# Altium PCB PCB2.PcbDoc
Units mil, origin at the board's own origin, x right, y up, seen from the top; angles counter-clockwise.
Board outline 866.14 x 866.14 mil, 4 copper layers (Top Layer, Internal Plane 1, Signal Layer 1, Bottom Layer), stack 30.634 mil thick; 48 components, 32 nets, 165 pads, 223 vias.
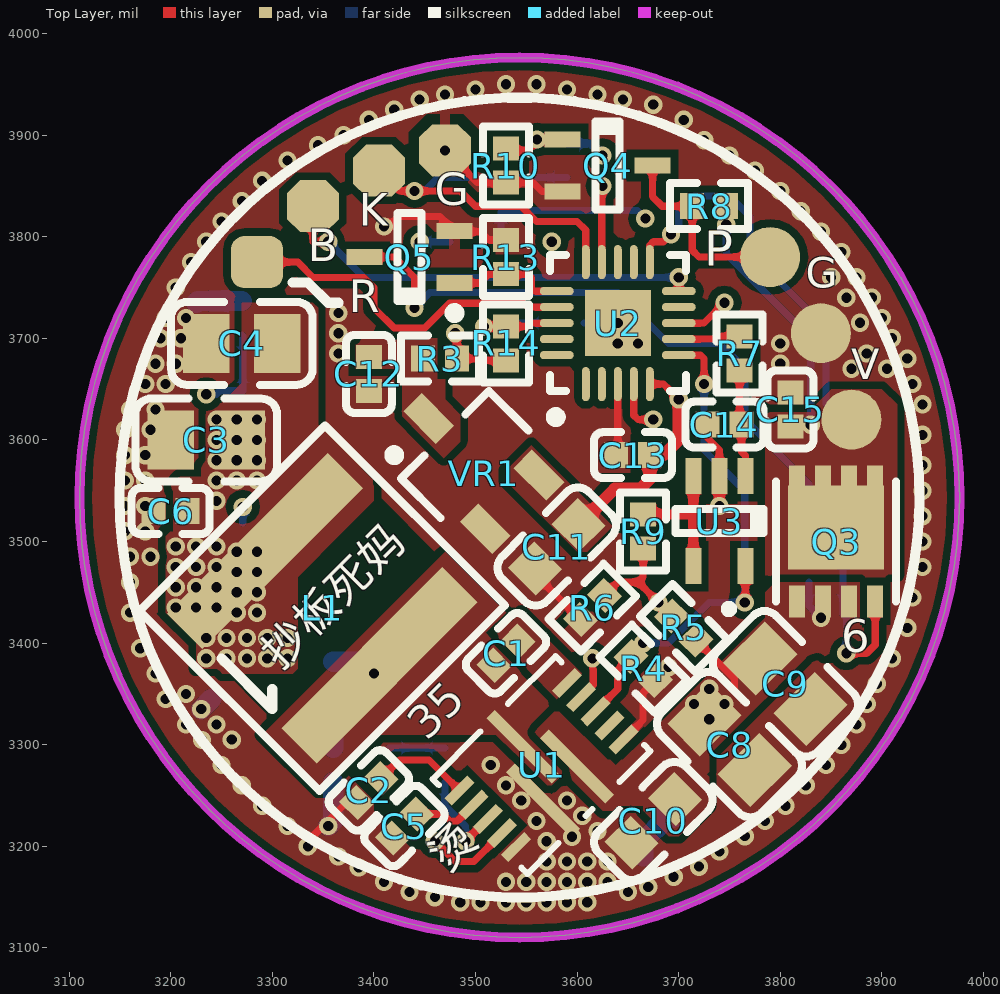
[diagram p0: Top Layer view]
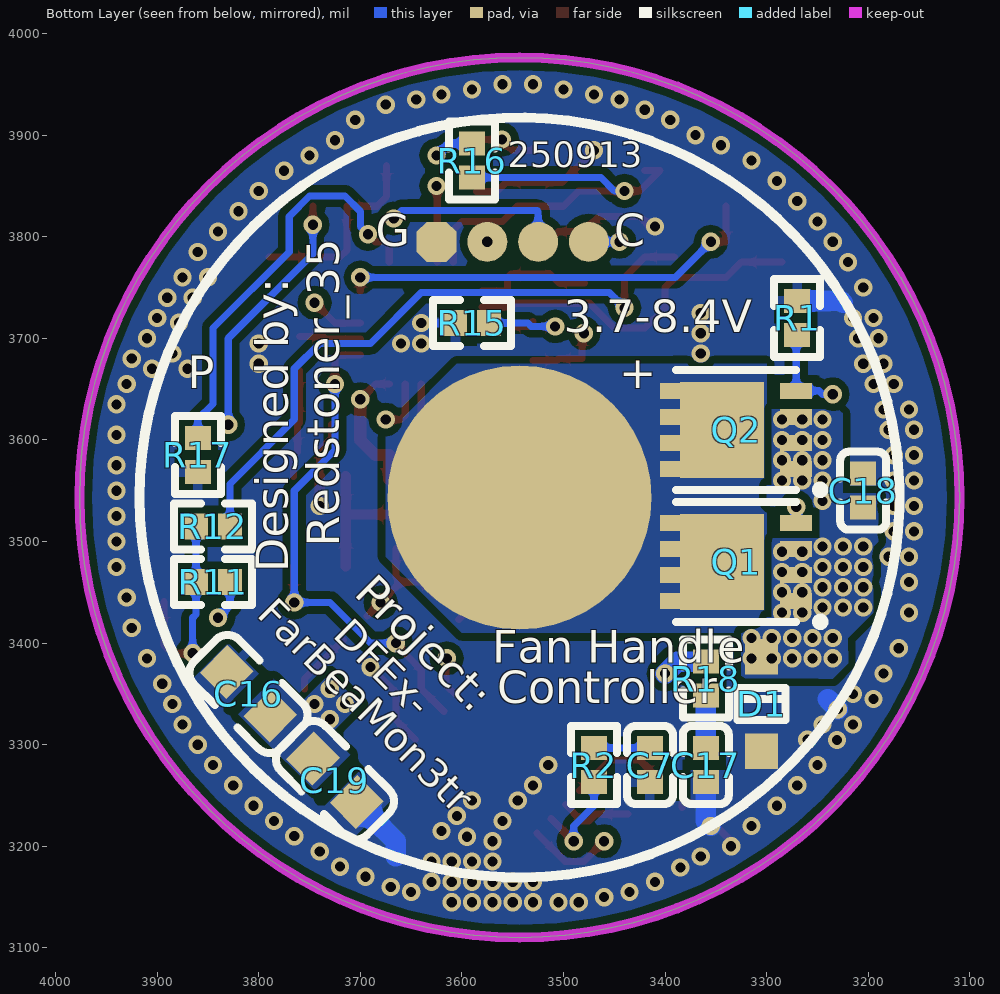
[diagram p1: Bottom Layer view, seen from below]
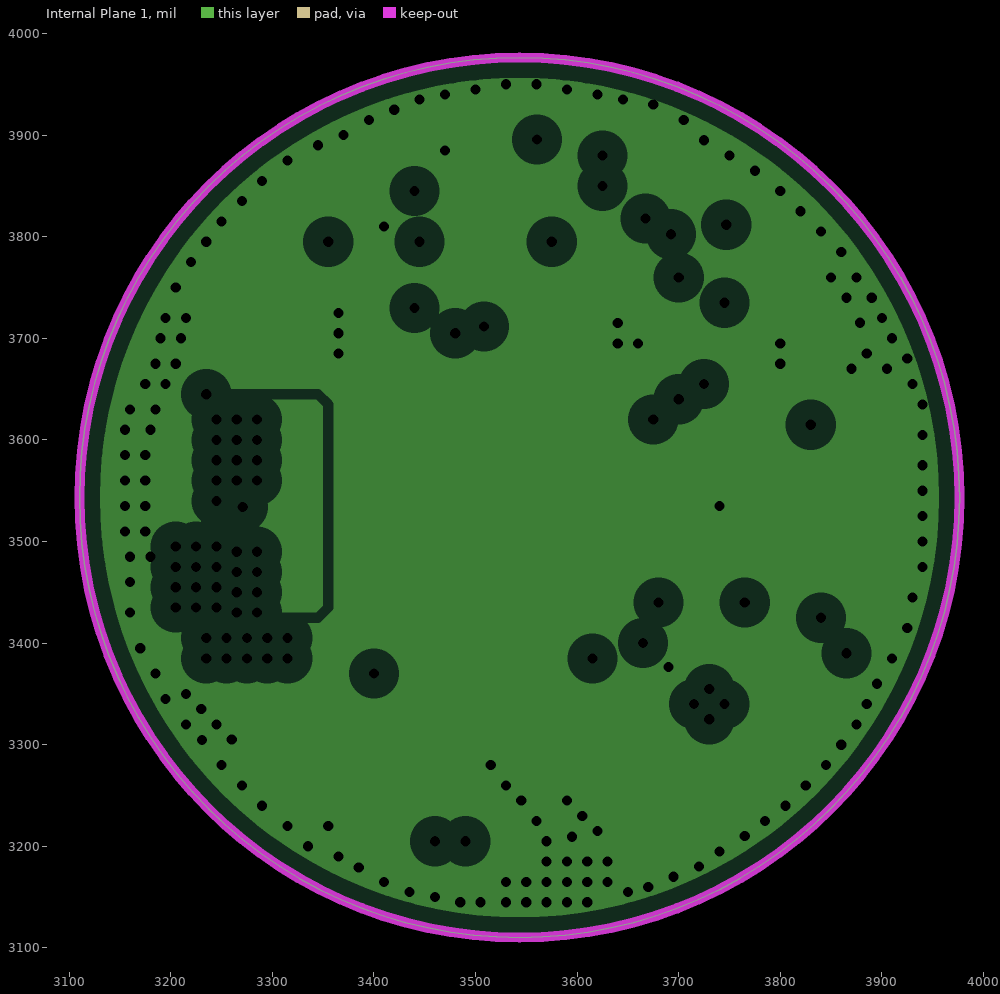
[diagram p2: Internal Plane 1, clearances drawn from the general rule]
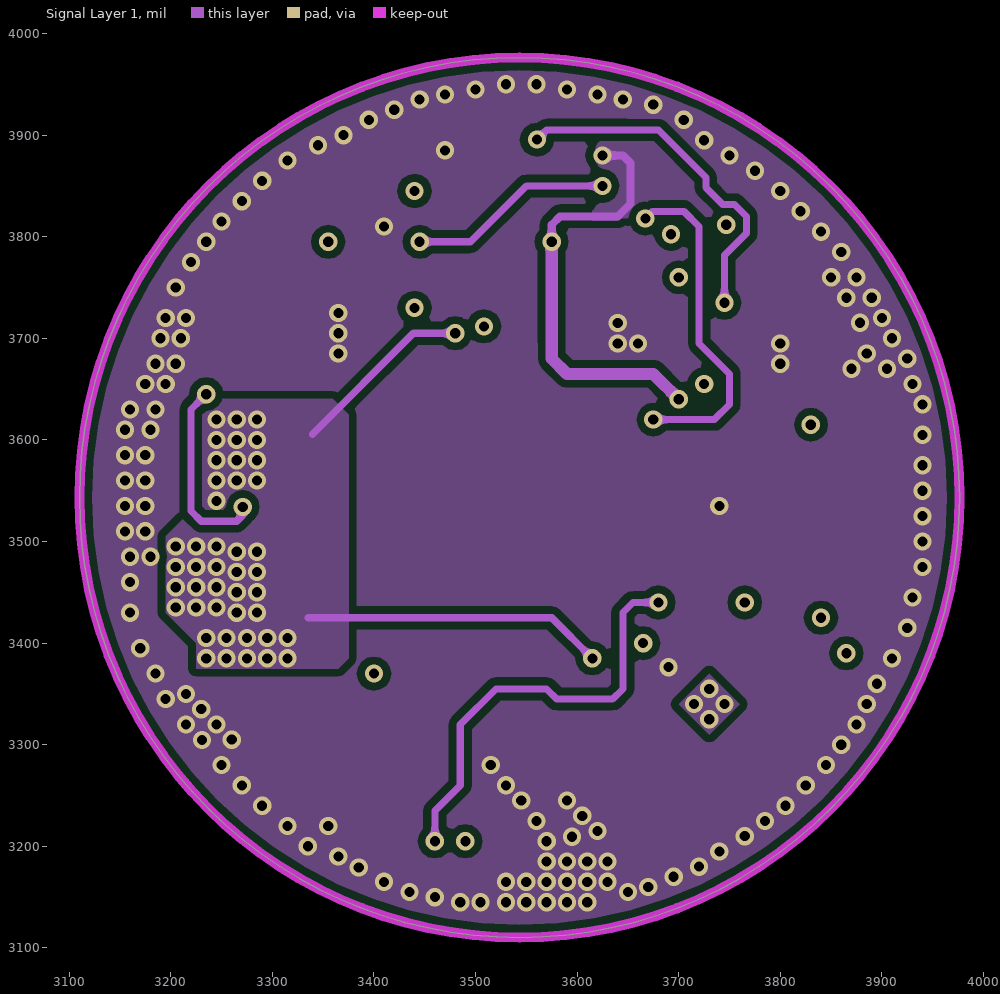
[diagram p3: Signal Layer 1]
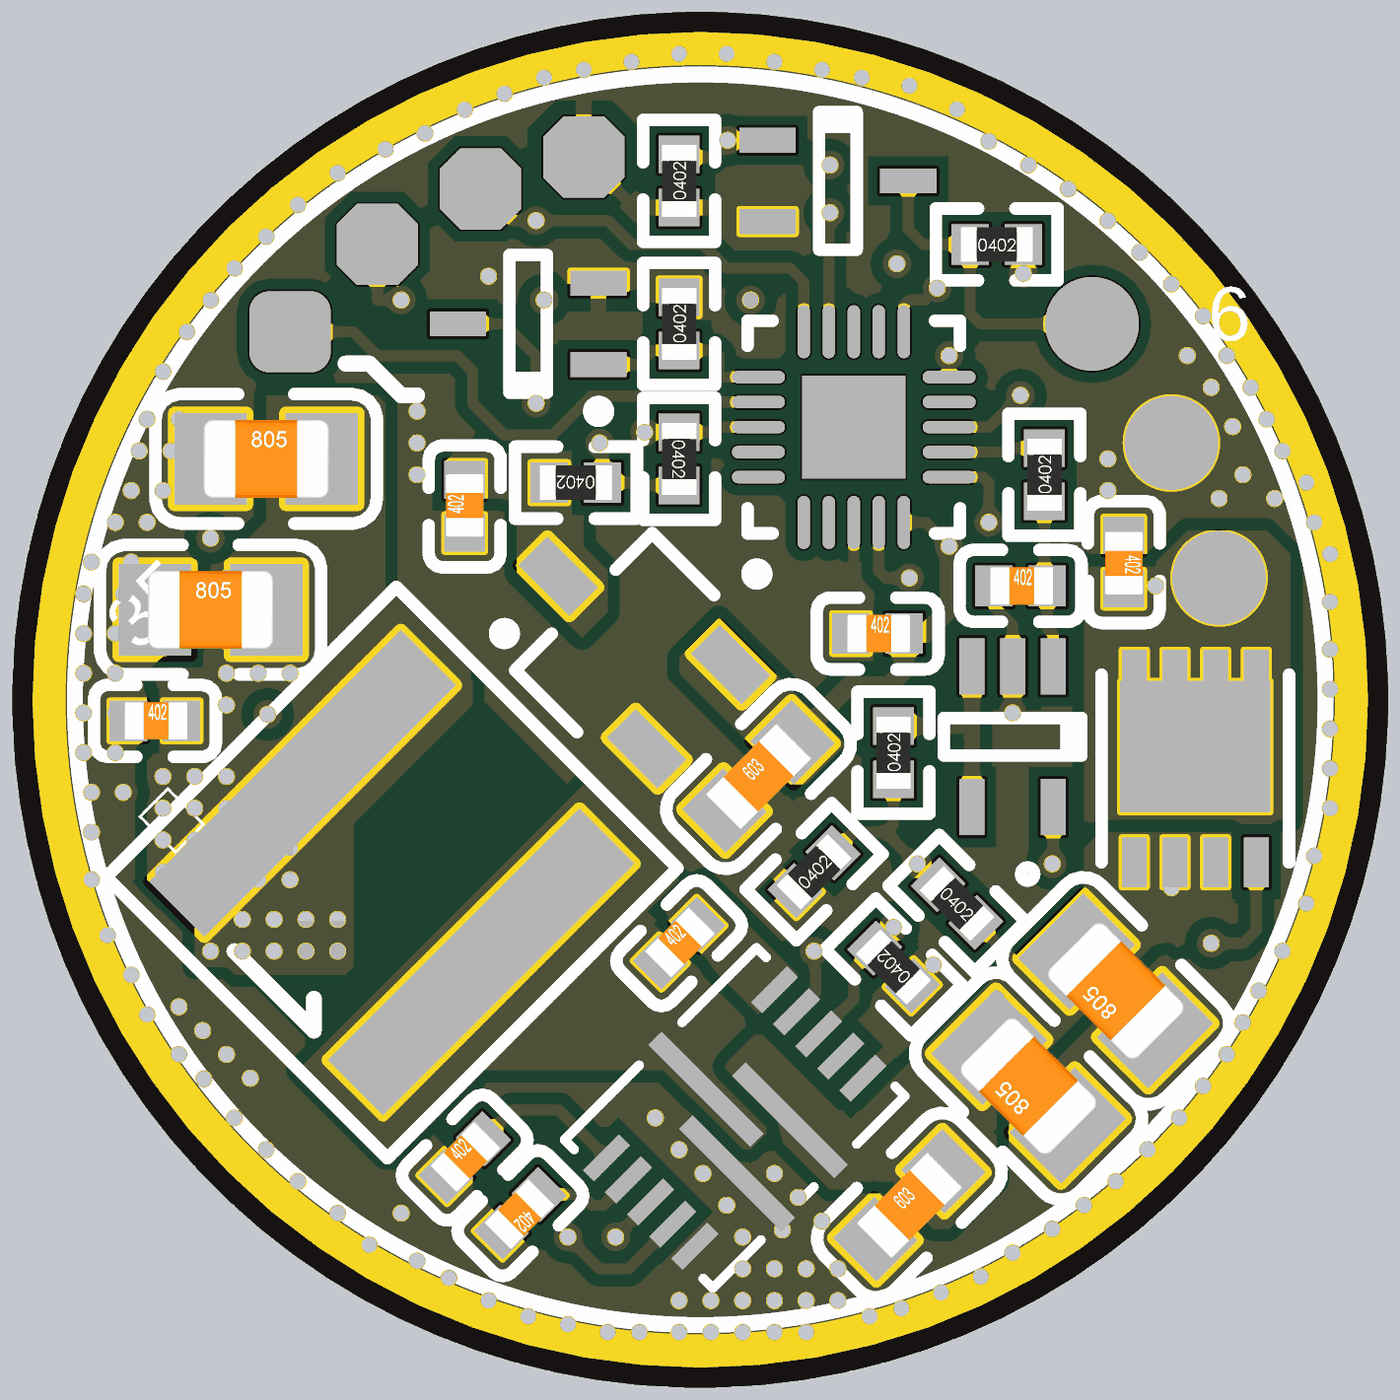
[diagram p4: 3D render of the assembled board from above, using the file's embedded part models]
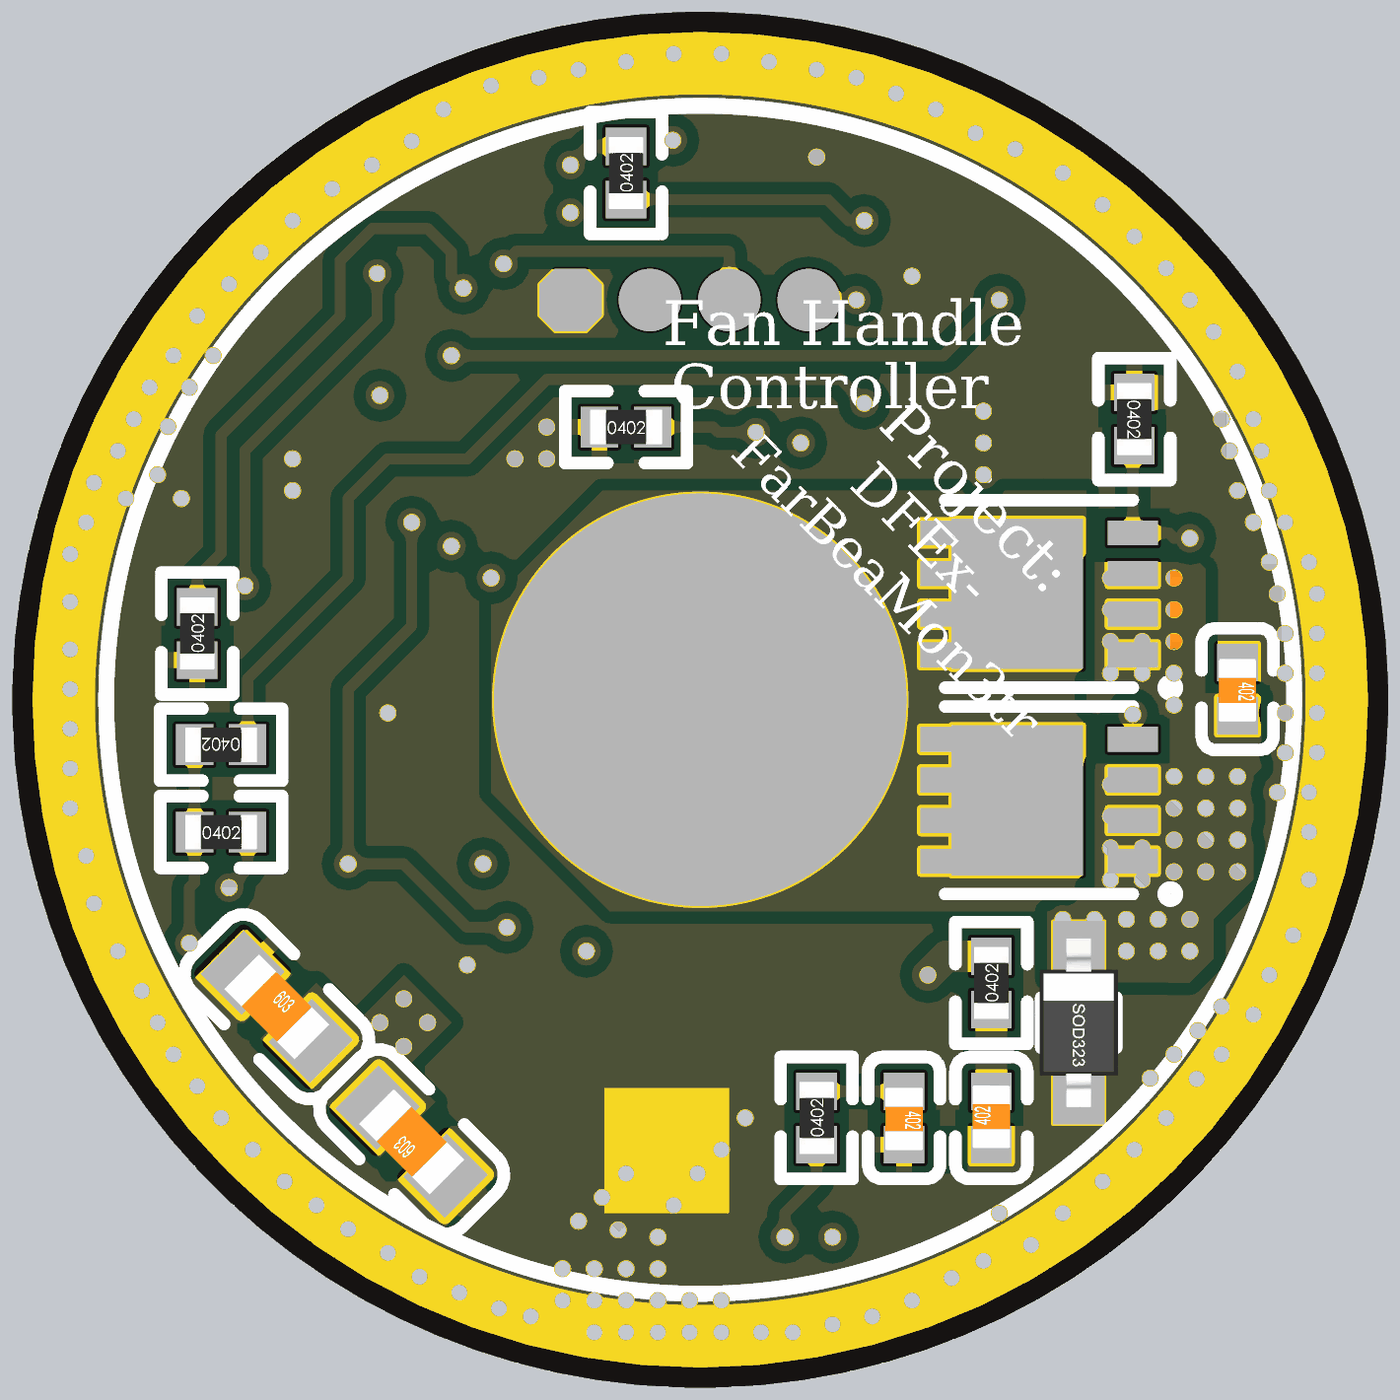
[diagram p5: 3D render of the assembled board from below, using the file's embedded part models]

## Layer stack, top to bottom
Top Solder: solder mask 0.4, Solder Resist, Dk 3.5
Top Layer: signal copper 1.4
Dielectric 1: core 10, FR-4, Dk 4.2
Internal Plane 1: plane copper 1.417
Dielectric 3: prepreg 5, Dk 4.2
Signal Layer 1: signal copper 1.417
Dielectric 2: core 10, Dk 4.2
Bottom Layer: signal copper 1.4
Bottom Solder: solder mask 0.4, Solder Resist, Dk 3.5

## Board outline
3543.31,3110.24 cw(c3543.31,3543.31) 3110.24,3543.31 cw(c3543.31,3543.31) 3543.31,3976.38 cw(c3543.31,3543.31) 3976.38,3543.31 cw(c3543.31,3543.31)

## Design rules (kind name [scope] priority, off if disabled: settings)
Clearance [All] p1: gap=7.5
PlaneClearance [All] p1: clearance=19.68
PlaneConnect [All] p1: planeconnectstyle=Direct reliefexpansion=20 reliefentries=4 reliefconductorwidth=10 reliefairgap=10
PolygonConnect PolygonConnect_1 [IsVia] p1: connectstyle=Direct reliefconductorwidth=10 reliefentries=4 polygonreliefangle="90 Angle" airgapwidth=10
PolygonConnect [All] p2: connectstyle=Direct reliefconductorwidth=10 reliefentries=4 polygonreliefangle="90 Angle" airgapwidth=10
RoomDefinition main [InComponentClass('main')] p1: confinementstyle=ConfineIn formatcopy=TRUE lockcomponents=FALSE outline 4040,3050 5420,3050 5420,3325 4040,3325
RoutingVias [All] p1: holewidth=28 width=50 viastyle="Through Hole" minholewidth=28 minwidth=50 maxholewidth=28 maxwidth=50
SolderMaskExpansion [All] p1: expansion=4
Width [All] p1: maxlimit=393.7 minlimit=7 preferedwidth=10
28 further rules are at their usual default settings.

## Components (designator, comment, footprint, x,y, rotation, side; value= is the part's Value field where it differs from the comment)
C1 "220nF (224) 10% 16V" 0402_C 3530,3390 r45 top
C2 "10uF (106) 20% 10V" 0402_C 3395,3255 r45 top
C3 "GRM21BR61A476ME15L" 0805_C 3235,3600 r0 top
C4 "GRM21BR61A476ME15L" 0805_C 3270,3695 r0 top
C5 "22nF (223) 10% 50V" 0402_C 3430,3220 r225 top
C6 "10uF (106) 20% 10V" 0402_C 3200,3530 r0 top
C7 "6.8nF (682) 10% 50V" 0402_C 3415,3280 r270 bottom
C8 "22uF (226) 20% 25V" 0805_C 3750,3300 r135 top
C9 "22uF (226) 20% 25V" 0805_C 3805,3360 r135 top
C10 "GRM188R61E106KA73D" 0603_C 3675,3225 r45 top
C11 "GRM188R61E106KA73D" 0603_C 3580,3495 r45 top
C12 "10uF (106) 20% 10V" 0402_C 3395,3665 r90 top
C13 "100nF (104) 10% 16V" 0402_C 3655,3585 r0 top
C14 "1.0uF (105) 10% 25V" 0402_C 3745,3615 r0 top
C15 "1.0uF (105) 10% 25V" 0402_C 3810,3630 r270 top
C16 "GRM188R61E106KA73D" 0603_C 3810,3350 r225 bottom
C17 "1nF (102) 10% 50V" 0402_C 3360,3280 r90 bottom
C18 "10uF (106) 20% 10V" 0402_C 3205,3550 r270 bottom
C19 "GRM188R61E106KA73D" 0603_C 3725,3265 r45 bottom
D1 "CESD12VD3" SOD-323 3305,3340 r270 bottom
L1 "XGL6060-102MEC" XAL6030-xxxME 3405,3380 r135 top locked
Q1 "XPX80P02RX" DFN-8_L3.0-W3.0-P0.65-BL 3330,3480 r90 bottom
Q2 "XPX80P02RX" DFN-8_L3.0-W3.0-P0.65-BL 3330,3610 r90 bottom
Q3 "XPX70P03RX" DFN-8_L3.0-W3.0-P0.65-BL 3855,3500 r0 top locked
Q4 "2N7002KW" SC70-3 3630,3870 r0 top locked
Q5 "2N7002KW" SC70-3 3435,3780 r180 top
R1 "10KΩ (1002) ±1%" 0402_R 3270,3720 r270 bottom
R2 "21.5KΩ (2152) ±1%" 0402_R 3470,3280 r90 bottom
R3 "10Ω (10R0) ±1%" 0402_R 3465,3680 r180 top
R4 "10KΩ (1002) ±1%" 0402_R 3665,3375 r135 top
R5 "510KΩ (5103) ±1%" 0402_R 3705,3415 r315 top
R6 "59KΩ (5902) ±1%" 0402_R 3615,3435 r45 top
R7 "10KΩ (1002) ±1%" 0402_R 3760,3685 r90 top
R8 "22KΩ (2202) ±1%" 0402_R 3730,3830 r0 top
R9 "220KΩ (2203) ±1%" 0402_R 3665,3510 r90 top
R10 "10KΩ (1002) ±1%" 0402_R 3530,3870 r90 top
R11 "51KΩ (5102) ±1%" 0402_R 3845,3460 r180 bottom
R12 "47KΩ (4702) ±1%" 0402_R 3845,3515 r0 bottom
R13 "10KΩ (1002) ±1%" 0402_R 3530,3780 r90 top
R14 "470KΩ (4703) ±1%" 0402_R 3530,3695 r270 top
R15 "100KΩ (1003) ±1%" 0402_R 3590,3715 r180 bottom
R16 "10KΩ (1002) ±1%" 0402_R 3590,3875 r90 bottom
R17 "0Ω (0R0) ±1%" 0402_R 3860,3585 r90 bottom
R18 "4.7Ω (4R70) ±1%" 0402_R 3360,3365 r90 bottom
U1 "MP3429GL-Z" QFN-MLP3*4-13L 3565,3280 r315 top
U2 "CMS8S6990NAQN20" QFN40P300X300X800_HS-21N 3640,3715 r90 top
U3 "LMV321IDCKR" SC70-5 3740,3520 r270 top locked
VR1 "ME6209A30M3G" SOT-23-3L 3495,3580 r315 top locked

## Footprints (in the part's own frame and the unit in brackets; to place one, negate y for a bottom-side part, rotate by r counter-clockwise, add the part's x,y. Pads: shape width x height; smd on the part's side, far side on the other; paste and mask are expansions set on the pad)
0402_C [mm]
  rect 0.6x0.65 smd mask+0.051: 1(-0.425,0) 2(0.425,0)
  silkscreen extent -0.98,-0.58 0.98,0.58, body extent -0.48,-0.3 0.52,0.3, height 0.2
0402_R [mm]
  rect 0.6x0.65 smd mask+0.051: 1(-0.425,0) 2(0.425,0)
  silkscreen extent -0.97,-0.58 0.97,0.58, body extent -0.57,-0.27 0.58,0.28, height 0.41
0603_C [mm]
  rect 0.93x0.98 smd: 1(-0.77,0) 2(0.77,0)
  silkscreen extent -1.53,-0.79 1.54,0.79, body extent -0.8,-0.4 0.8,0.4, height 0.3
0805_C [mm]
  rect 1.16x1.47 smd: 1(-0.89,0) 2(0.89,0)
  silkscreen extent -1.77,-1.04 1.77,1.04, body extent -1,-0.62 1,0.63, height 0.77
DFN-8_L3.0-W3.0-P0.65-BL [mm]
  rect 0.4x0.8 smd paste-100 mask+0.051: 1(-0.975,-1.5) 2(-0.325,-1.5) 3(0.325,-1.5) 4(0.975,-1.5) 5(0.975,1.5) 6(0.325,1.5) 7(-0.325,1.5) 8(-0.975,1.5)
  rect 2.4x2.1 smd paste-100 mask+0.051: 8(0,0.35)
  silkscreen extent -1.6,-2.2 1.5,1.5, body extent -1.52,-1.52 1.52,1.52, height 1.2
QFN40P300X300X800_HS-21N [mm] "QFN, 20-Leads, Body 3.00x3.00mm, Pitch 0.40mm, Thermal Pad 1.65x1.65mm, IPC Medium Density"
  oval 0.85x0.2 smd mask+0.03: 1(-1.525,0.8) 2(-1.525,0.4) 3(-1.525,0) 4(-1.525,-0.4) 5(-1.525,-0.8) 11(1.525,-0.8) 12(1.525,-0.4) 13(1.525,0) 14(1.525,0.4) 15(1.525,0.8)
  oval 0.2x0.85 smd mask+0.03: 6(-0.8,-1.525) 7(-0.4,-1.525) 8(0,-1.525) 9(0.4,-1.525) 10(0.8,-1.525) 16(0.8,1.525) 17(0.4,1.525) 18(0,1.525) 19(-0.4,1.525) 20(-0.8,1.525)
  rect 1.65x1.65 smd mask+0.03: 21(0,0)
  silkscreen extent -2.47,-1.7 1.7,1.7, body extent -1.55,-1.55 1.55,1.55, height 0.8
QFN-MLP3*4-13L [mil] "MP3429/MP3431通用的FCQFN3*4mm的封装"
  rect 91x12 smd paste+0 mask+0: 1(-25.59,0) 7(25.59,-23.62) 8(25.59,23.62)
  rect 10x32 smd paste+0 mask+0: 2(-39.37,-74.8) 3(-19.69,-74.8) 4(0,-74.8) 5(19.69,-74.8) 6(39.37,-74.8) 9(39.37,74.8) 10(19.69,74.8) 11(0,74.8) 12(-19.69,74.8) 13(-39.37,74.8)
  silkscreen extent -66,-86 66,86, body extent -65,-85 65,85, height 39
SC70-3 [mm] "3 Lead SC70(SOT-323) package for small Transistor"
  rect 0.9x0.4 smd mask+0.05: 1(-1.125,0.65) 2(-1.125,-0.65) 3(1.125,0)
  silkscreen extent -0.3,-1.1 0.3,1.1, body extent -0.67,-1.1 0.67,1.1, height 1.1
SC70-5 [mm] "SOT23, 6-Leads, Body 2.00x2.10mm, Pitch 0.65mm, IPC Medium Density"
  rect 0.9x0.4 smd mask+0.05: 1(-1.125,0.65) 2(-1.125,0) 3(-1.125,-0.65) 4(1.125,-0.65) 5(1.125,0.65)
  silkscreen extent -0.3,-1.1 0.3,1.1, body extent -0.67,-1.1 0.67,1.1, height 1.1
SOD-323 [mm]
  rect 0.889x0.83 smd mask+0.025: 1(1.18,0) 2(-1.18,0)
  silkscreen extent -0.4,-0.6 0.4,0.6, body extent -1.35,-0.63 1.35,0.62, height 1.1
SOT-23-3L [mm] "http://www.aosmd.com/res/packaging_information/SOT-23-3L.pdf"
  rect 1.15x0.65 smd: 1(1.475,-0.95) 2(1.475,0.95) 3(-1.475,0)
  silkscreen extent -1.56,-1.55 0.5,1.55, body extent -0.9,-1.55 0.9,1.55, height 1.25
XAL6030-xxxME [mm] "CoilCraft XAL6030 molded inductor"
  rect 1.25x5.69 smd: 1(4.001,0.025) 2(-0.039,0.025)
  silkscreen extent -1.2,-3.25 5.16,3.31, body extent -1.19,-3.28 5.16,3.33, height 3.1

## Part data
C1: library part "0402 220nF (224) 10% 16V", "贴片电容"
C2 C6 C12 C18: library part "0402 10uF (106) 20% 6.3V", "贴片电容"
C3 C4: library part "0805 22uF (226) 20% 25V", "贴片MLCC电容，47uF (476) 20% 10V"
C5: library part "0402 22nF (223) 10% 50V", "贴片电容"
C7: library part "0402 10nF (103) 10% 50V", "贴片电容"
C8 C9: library part "0805 22uF (226) 20% 25V", "贴片电容"
C10 C16 C19: library part "0603 4.7uF (475) 10% 16V", "0603贴片MLCC电容 10uF ±20% 25V X5R"
C11: library part "0603 10uF (106) 10% 10V", "0603贴片MLCC电容 10uF ±20% 25V X5R"
C13: library part "0402 100nF (104) 10% 16V", "贴片电容"
C14 C15: library part "0402 1.0uF (105) 10% 25V", "贴片电容"
C17: library part "0402 1nF (102) 10% 50V", "贴片电容"
D1: library part "SOD-323 1N4148WS T4", "12V TVS二极管"
L1: library part "Inductor Iron", "线艺超低损耗系列一体成型电感 1.0uH±20% 2.5mΩ DCR 23A饱和电流 6.5*6.7*6.2mm"
Q1 Q2: library part "SON/DFN5x6 MOS", "-20V -80A 4mR内阻 P沟道MOSFET"
Q3: library part "SON/DFN5x6 MOS", "-30V -70A 6.5mR P沟道增强型MOSFET"
Q4 Q5: library part "2N7002 7002", "单N沟道MOSFET(场效应管)"
R1 R4 R7 R10 R13 R16: library part "0402 10KΩ (1002) 1%", "贴片电阻"
R2: library part "0402 18KΩ (1802) 1%", "贴片电阻"
R3: library part "0402 22Ω (22R0) 1%", "贴片电阻"
R5 R6: library part "0402 510KΩ (5103) 1%", "贴片电阻"
R8: library part "0402 22KΩ (2202) 1%", "贴片电阻"
R9 R15: library part "0402 100KΩ (1003) 1%", "贴片电阻"
R11: library part "0402 47KΩ (4702) 1%", "贴片电阻"
R12: library part "0402 51KΩ (5102) 1%", "贴片电阻"
R14: library part "0402 470KΩ (4703) 1%", "贴片电阻"
R17: library part "0402 0Ω (0R0) 1%", "贴片电阻"
R18: library part "0402 1Ω (1R00) 1%", "贴片电阻"
U1: "16VOUT, 21A Peak Current Fully Integrated Synchronous Boost Converter"
U2: library part CM8S6990NA-QFN20, "增强型闪存1T 8051单片机，16KB Flash 256+1K XRAM"
U3: "CMOS超小型运算放大器，SC70-5"
VR1: library part "SOT-23 XC6206P332MR", "低压差线性稳压(LDO)，输入耐压18V 输出3V 300mA最大电流 SOT23-3封装"

## Free pads (board coordinates)
  round 39.37 smd far side mask+1.18: 0(3475,3795) 1(3575,3795) 2(3525,3795)
  round 259.84 smd far side mask+1.18: 0(3543.31,3543.31)
  round 59.06 smd mask+1.18: 1(3870,3620) 2(3790,3780) 2(3840,3705)
  oct 39.37x39.37 smd far side mask+1.18: 2(3625,3795)
  rrect50% 51.18x51.18 smd mask+1.18: 3(3285,3775)
  oct 51.18x51.18 smd mask+1.18: 4(3340,3830) 5(3405,3865) 6(3470,3885)

## Via types
v1: diameter 18, hole 10, Top Layer to Bottom Layer, tented both sides, 223 vias

## Nets (pads, with @x,y where several pads share a name; then routed paths per layer and width w, separated by ;. In a path a pad name is that pad's centre, name@x,y a point inside that pad or via, vN(x,y) a via of type N, cw(c..) or ccw(c..) an arc to the next point about the centre after c; other vN are vias at no path point)
3V7: C3.2 C4.2 C6.2 C18.2 D1.2 L1.1 Q1.1 Q1.2 Q1.3 Q2.1 Q2.2 Q2.3 R3.1 R14.2 U1.12 | length 596.5
  Top Layer w7: v1(3480,3705) 3481.73,3703.27 R3.1 3505,3680 3506.73,3678.27 R14.2 ; U1.12 3615.9,3358.74 3615.9,3373.97 3615,3374.88 v1(3615,3385)
  Signal Layer 1 w7: 3335,3425 3575,3425 v1(3615,3385) ; 3339.4,3605.6 3438.79,3705 v1(3480,3705)
  other v1: 3235,3385 3255,3385 3275,3385 3295,3385 3315,3385 3235,3405 3255,3405 3275,3405 3295,3405 3315,3405 3265,3430 3285,3430 3205,3435 3225,3435 3245,3435 3265,3450 3285,3450 3205,3455 3225,3455 3245,3455 3265,3470 3285,3470 3205,3475 3225,3475 3245,3475 3265,3490 3285,3490 3205,3495 3225,3495 3245,3495 3245,3540 3245,3560 3265,3560 3285,3560 3245,3580 3265,3580 3285,3580 3245,3600 3265,3600 3285,3600 3245,3620 3265,3620 3285,3620
12V: C8.2 C9.2 C10.2 C16.2 C19.2 Q3.1 Q3.2 Q3.3 R5.2 R11.2 U1.8 | length 103.8
  Top Layer w7: R5.2 3755,3365 3755,3355
  Bottom Layer w7: R11.2 3828.27,3436.73 v1(3840,3425)
  other v1: 3730,3325 3715,3340 3745,3340 3730,3355
BST: C1.2 U1.13
COMP: R2.1 U1.4 | length 97.8
  Top Layer w7: v1(3490,3205) U1.4
  Bottom Layer w7: R2.1 3470,3240 3490,3220 v1(3490,3205)
DSCK: pad.0@3475,3795 U2.14 | length 307.7
  Top Layer w7: U2.14 v1@3624.25,3850
  Signal Layer 1 w7: v1(3445,3795) 3495,3795 3550,3850 v1(3625,3850)
  Bottom Layer w7: v1(3445,3795) pad.0@3475,3795
DSDA: pad.2@3525,3795 U2.4 | length 558.1
  Top Layer w7: U2.4 3655.75,3624.25 3660,3620 v1(3675,3620)
  Signal Layer 1 w7: v1(3667.16,3817.84) 3674.31,3825 3705,3825 3720,3810 3720,3695 3750,3665 3750,3635 3735,3620 v1(3675,3620)
  Bottom Layer w7: pad.2@3525,3795 3525,3825 3525.69,3825.69 3659.31,3825.69 v1(3667.16,3817.84)
EN: R4.2 U1.11 U2.6 U3.5 | length 522.1
  Top Layer w7: U1.11 3640,3355 3640,3373.66 R4.2 3665,3398.66 v1(3665,3400) ; U2.6 3721.5,3683.5 3725,3680 v1(3725,3655) ; v1(3765,3440) 3765.59,3440.59 U3.5
  Bottom Layer w7: v1(3665,3400) 3690,3400 3730,3440 v1(3765,3440) 3765,3550 3725,3590 v1(3725,3655)
FANG: Q3.4 R11.1 R12.2 | length 200.8
  Top Layer w7: v1(3865,3390) 3885,3390 3893.39,3398.39 Q3.4
  Bottom Layer w7: R12.2 R11.1 3861.73,3428.27 3865,3425 v1(3865,3390)
FANPWM: pad.2@3790,3780 Q4.3 R8.1 | length 196.2
  Top Layer w7: Q4.3 3674.29,3839.42 3683.71,3830 R8.1 3713.27,3786.73 3720,3780 pad.2@3790,3780
FANPWREN: Q5.1 R13.1 U2.16 | length 118.7
  Top Layer w7: Q5.1 3504.41,3754.41 3513.27,3763.27 R13.1 3551.73,3763.27 3555,3760 3555,3747.4 3555.9,3746.5 U2.16
FB: R5.1 R6.2 R9.1 U1.5 | length 629.4
  Top Layer w7: v1(3460,3205) 3480,3185 3498.28,3185 3526.03,3212.74 U1.5 ; R6.2 3640,3460 3660,3460 ; R9.1 3665,3465 3660,3460 ; R5.1 3660,3460
  Signal Layer 1 w7: v1(3460,3205) 3460,3235 3485,3260 3485,3320 3520,3355 3570,3355 3580,3345 3635,3345 3645,3355 3645,3430 3655,3440 v1(3680,3440)
GLED: pad.4 U2.10 | length 423
  Top Layer w7: pad.4 3340,3795 v1(3355,3795) ; v1(3700,3760) U2.10 U2.10
  Bottom Layer w7: v1(3355,3795) 3390,3760 v1(3700,3760)
GND: C2.1 C3.1 C4.1 C5.2 C6.1 C7.2 C8.1 C9.1 C10.1 C11.1 C12.1 C13.1 C14.1 C15.1 C16.1 C17.1 C18.1 C19.1 D1.1 pad.2@3625,3795 pad.2@3840,3705 pad.6 Q4.2 Q5.2 R1.1 R4.1 R6.1 R10.1 R13.2 R15.1 R17.1 U1.6 U1.7 U1.9 U2.3 U2.21 U3.2 VR1.1 | length 868
  Top Layer w7: v1@3330,3200 3373.17,3243.17 C2.1 C2.1@3383.17,3238.17 ; v1(3410,3810) 3415,3810 3425,3820 3464.88,3820 Q5.2 3479.88,3805 3505,3805 3513.27,3796.73 R13.2 ; v1(3470,3885) 3501.73,3853.27 R10.1 3556.73,3853.27 3565.59,3844.41 Q4.2 ; C11.1 3558.56,3467.77 R6.1 ; C13.1 3640,3586.73 U2.3 ; U1.9 3665,3324.32 3665,3351.34 R4.1 v1(3690,3376.34) v1@3690,3380 ; C14.1 3728.27,3601.73 3740,3590 U3.2
  Top Layer w10: v1(3740,3535) U3.2
  Bottom Layer w7: R15.1 v1(3640,3715)
  Bottom Layer w20: 3225,3735 3226.73,3736.73 R1.1 ; v1(3230,3335) 3240,3345 ; v1(3355,3220) 3360,3225 C17.1 ; 3665,3190 3665,3205 C19.1
  other v1: 3485,3145 3505,3145 3530,3145 3550,3145 3570,3145 3590,3145 3610,3145 3460,3150 3435,3155 3650,3155 3670,3160 3410,3165 3530,3165 3550,3165 3570,3165 3590,3165 3610,3165 3630,3165 3695,3170 3385,3179.17 3720,3180 3570,3185 3590,3185 3610,3185 3630,3185 3365,3190 3740,3195 3335,3200 3570,3205 3595.03,3209.49 3765,3210 3620,3215 3315,3220 3560,3225 3785,3225 3605,3230 3290,3240 3805,3240 3545,3245 3590,3245 3270,3260 3530,3260 3825,3260 3250,3280 3515,3280 3845,3280 3860,3300 3230.73,3304.59 3260,3305 3215,3320 3245,3320 3875,3320 3885,3340 3195,3345 3215,3350 3895,3360 3185,3370 3910,3385 3170,3395 3925,3415 3160,3430 3930,3445 3160,3460 3940,3475 3160,3485 3180,3485 3940,3500 3155,3510 3175,3510 3940,3525 3155,3535 3175,3535 3940,3550 3155,3560 3175,3560 3940,3575 3155,3585 3175,3585 3940,3605 3155,3610 3180,3610 3160,3630 3185,3630 3940,3635 3175,3655 3195,3655 3930,3655 3870,3670 3905,3670 3185,3675 3205,3675 3800,3675 3925,3680 3365,3685 3885,3685 3640,3695 3660,3695 3800,3695 3190,3700 3210,3700 3910,3700 3365,3705 3878.51,3715.32 3195,3720 3215,3720 3900,3720 3365,3725 3865,3740 3890,3740 3205,3750 3850,3760 3875,3760 3220,3775 3860,3785 3235,3795 3840,3805 3250,3815 3820,3825 3270,3835 3800,3845 3290,3855 3775,3865 3315,3875 3750,3880 3345,3890 3725,3895 3370,3900 3395,3915 3705,3915 3420,3925 3675,3930 3445,3935 3645,3935 3470,3940 3620,3940 3500,3945 3590,3945 3530,3950 3560,3950
INJO: R9.2 U3.3 U3.4 | length 138.7
  Top Layer w10: R9.2 3712.68,3526.73 3714.41,3525 ; U3.4 3714.41,3525 ; U3.3 3714.41,3525
INTVCC: C2.2 U1.2 | length 97.4
  Top Layer w7: C2.2 3425,3285 3454.21,3285 U1.2
KEY: pad.5 R16.1 U2.15 | length 429.7
  Top Layer w7: pad.5@3420,3865 pad.5 3425,3845 v1(3440,3845) 3485,3845 3500,3830 3545,3830 3560,3815 3600,3815 3608.5,3806.5 U2.15
  Bottom Layer w7: v1(3440,3845) 3450,3845 3463.27,3858.27 R16.1
MODESET: R17.2 U2.11 | length 407.7
  Top Layer w7: U2.11 3671.5,3791.5 3675,3795 3685,3795 v1(3692.5,3802.5)
  Bottom Layer w7: v1(3692.5,3802.5) 3700,3810 3700,3825 3715,3840 3750,3840 3770,3820 3770,3785 3845,3710 3845,3635.42 3860,3620.42 R17.2
NetC7_1: C7.1 R2.2 | length 55
  Bottom Layer w7: C7.1 R2.2
NetC12_2: C12.2 R3.2 VR1.3
NetC14_2: C14.2 R7.1 U3.1 | length 106.3
  Top Layer w7: R7.1 3760,3616.73 C14.2 3761.73,3588.27 3765.59,3584.41 U3.1
NetC17_2: C17.2 R18.1 | length 51.5
  Bottom Layer w20: C17.2 R18.1
NetQ5_3: Q5.3 R12.1 | length 631.1
  Top Layer w7: Q5.3 3420,3780 3440,3760 v1(3440,3730)
  Bottom Layer w7: v1(3440,3730) 3455,3745 3640,3745 3690,3695 3740,3695 3765,3670 3765,3620 3828.27,3556.73 R12.1
PWMCTRL: Q4.1 R10.2 U2.8 | length 459.2
  Top Layer w7: R10.2 3531.73,3885 3550,3885 v1(3560.59,3895.59) Q4.1 ; U2.8 3725,3715 v1(3745,3735)
  Signal Layer 1 w7: v1(3560.59,3895.59) 3570,3905 3680,3905 3726.73,3858.27 3726.73,3848.27 3743.27,3831.73 3755.02,3831.73 3766.73,3820.02 3766.73,3803.45 3745,3781.72 v1(3745,3735)
REVG: Q1.4 Q2.4 R1.2 | length 296.5
  Signal Layer 1 w7: v1(3235,3645) 3220,3630 3220,3530 3230,3520 3265,3520 3270.94,3525.94 v1(3270.94,3534.06)
  Bottom Layer w7: v1(3235,3645) 3245,3645 3248.39,3648.39 Q2.4 3270.94,3702.33 R1.2 ; v1@3270,3535 v1(3270.94,3534.06) Q1.4
RLED: pad.3 U2.17 | length 345.3
  Top Layer w7: pad.3 3325,3775 3340,3760 3390,3760 3400,3750 3400,3730 3420,3710 3450,3710 3474.54,3734.54 3547.35,3734.54 3551.15,3730.75 U2.17
SS: C5.1 U1.3 | length 70.8
  Top Layer w7: C5.1@3436.83,3231.83 3468.17,3231.83 3475,3225 3482.16,3225 U1.3
SW: C1.1 L1.2 R18.2 U1.1 | length 44.9
  Bottom Layer w20: R18.2 3388.27,3381.73 v1(3400,3370)
VBAT: pad.0@3543.31,3543.31 Q1.5 Q1.6 Q1.7 Q1.8 Q2.5 Q2.6 Q2.7 Q2.8
VFAN: C15.2 pad.1@3870,3620 Q3.5 Q3.6 Q3.7 Q3.8 R8.2 | length 251.9
  Top Layer w7: v1@3745,3810 v1(3746.73,3811.73) R8.2
  Bottom Layer w7: v1(3746.73,3811.73) 3746.73,3783.27 3830,3700 v1(3830,3615)
VMCU: C11.2 C13.2 pad.1@3575,3795 R16.2 U2.5 VR1.2 | length 698.8
  Top Layer w7: U2.5 3685.04,3654.96 v1(3700,3640)
  Top Layer w12: C11.2 3637.04,3552.04 3662.04,3552.04 3671.5,3561.5 3671.5,3585.24 3685.24,3585.24 3700,3600 v1(3700,3640)
  Signal Layer 1 w8: v1(3575,3795) 3575,3811.82 3583.18,3820 3640,3820 3652.5,3832.5 3652.5,3872.5 3645,3880 v1(3625,3880)
  Signal Layer 1 w12: v1(3575,3795) 3575,3680 3590,3665 3675,3665 v1(3700,3640) v1@3695,3645
  Bottom Layer w8: R16.2 3613.27,3891.73 v1(3625,3880)
VPWM: R7.2 U2.7 | length 61
  Top Layer w7: U2.7 3734.25,3699.25 3736.73,3701.73 R7.2
VSEN: R14.1 R15.2 U2.18 | length 141.8
  Top Layer w7: v1(3508.27,3711.73) R14.1 3551.73,3711.73 3555,3715 U2.18 ; R14.1@3530,3716.73 R14.1@3531.73,3715
  Bottom Layer w7: v1(3508.27,3711.73) 3531.73,3711.73 3535,3715 R15.2
pads on no net: U1.10 U2.1 U2.2 U2.9 U2.12 U2.13 U2.19 U2.20

## Polygon pours and split planes (outlines as drawn)
GND on Bottom Layer "Component Side-No Net 1" (solid, remove dead copper, pour order 66): 3592.5,3825.69 3592.5,3767.5 3600,3760 3770,3760 3820,3760 3835,3745 3935,3745 3935,3865 3925,3875 3895,3905 3730,3905 3715,3905 3650,3840 3640,3830 3640,3825.69
GND on Bottom Layer "Component Side-No Net 1" (solid, remove dead copper, pour order 73): 3650,3875 3665,3875 3800,3740 3845,3695 3845,3620 3985,3620 3980,3625 3980,3945
3V7 on Bottom Layer "Component Side-No Net 1" (solid, remove dead copper, pour order 77): 3290,3630 3290,3420 3325,3420 3325,3365 3235,3365 3220,3380 3220,3405 3195,3430 3195,3510 3220,3510 3225,3505 3225,3630
3V7 on Bottom Layer "Component Side-No Net 1" (solid, remove dead copper, pour order 79): 3195,3452.75 3195,3495 3190,3500 3190,3545 3195,3550 3235,3550 3235,3455
3V7 on Bottom Layer "Component Side-No Net 1" (solid, remove dead copper, pour order 87): 3255,3630 3295,3630 3300,3625 3300,3525 3300,3410 3285,3395 3225,3395
VBAT on Bottom Layer "Component Side-No Net 1" (solid, remove dead copper, pour order 89): 3300,3670 3300,3410 3550,3410 3600,3410 3675,3485 3675,3570 3675,3605 3605,3675 3300,3675
GND on Bottom Layer "Component Side-No Net 1" (solid, remove dead copper, pour order 93): 3250,3390 3250,3290 2990,3290 2985,3295 2995,3305 2995,3615 2995,3720 3010,3735 3045,3770 3250,3770
GND on Bottom Layer "Component Side-No Net 1" (solid, remove dead copper, pour order 109): 3230,3320 3235,3325 3235,3435 3125,3765 3035,3425 3010,3400 3010,3380
GND on Bottom Layer "Component Side-No Net 1" (solid, remove dead copper, pour order 111): 3405,3660 3666.22,3660 3690,3683.78 3675,3698.78 3675,3760 3350,3760
12V on Bottom Layer "Component Side-No Net 1" (solid, remove dead copper, pour order 135): 3730,3370 3760,3340 3785,3365 3815,3335 3820,3330 3800,3310 3745,3255 3730,3270 3710,3290 3720,3300 3730,3310 3720,3320 3700,3340
GND on Bottom Layer "Component Side-No Net 1" (solid, remove dead copper, pour order 137): 3830,3400 3915,3315 3915,3303.13 3862.6,3250.73 3781.87,3170 3745,3170 3685,3230 3670,3245 3670,3250 3685,3265 3695,3275 3700,3275 3720,3255 3735,3240 3745,3240 3835,3330 3835,3340 3830,3340 3820,3350 3800,3370
GND on Bottom Layer "Component Side-No Net 1" (solid, remove dead copper, pour order 141): 3010,3035 3025,3020 3995,3020 3995,3150 4150,3305 4140,3315 4140,3965 4090,3965 3975,4080 3960,4065 3555,4065 2995,4065 2910,3980
GND on Bottom Layer "Component Side-No Net 1" (solid, remove dead copper, pour order 143): 3265,3340 3271.93,3333.07 3339.7,3333.07 3339.7,3275.3 3340,3275 3375,3275 3375,3220 3366.24,3211.24 3264.67,3211.24
GND on Top Layer "Component Side-No Net 1" (solid, remove dead copper, pour order 62): 3355,3040 3355,3101.22 3448.78,3195 3363.78,3280 3360,3280 3350,3280 3260,3190
SW on Top Layer "Component Side-No Net 1" (solid, remove dead copper, pour order 42): 3470,3490 3530,3430 3515,3415 3510,3410 3535,3385 3545,3375 3545,3350 3545,3315 3570,3290 3585,3275 3585,3270 3580,3265 3575,3260 3570,3260 3560,3270 3520,3310 3495,3310 3405,3310 3385,3290 3350,3255 3345,3255 3295,3305 3290,3310
BST on Top Layer "Component Side-No Net 1" (solid, remove dead copper, pour order 43): 3515.65,3404.35 3520.65,3404.35 3580,3345 3605,3370 3545,3430
GND on Top Layer "Component Side-No Net 1" (solid, remove dead copper, pour order 45): 3177.35,3434.48 3177.35,3427.65 3350,3255 3385,3220 3385,3145 3345,3105 3315,3135 3110,3135 3110,3430 3100,3440
GND on Top Layer "Component Side-No Net 1" (solid, remove dead copper, pour order 46): 3485,3310 3485,3280 3500,3265 3540,3225 3545,3225 3545,3220 3540,3215 3520,3195 3520,3150 3520,3115 3540,3095 3585,3070 3645,3125 3690.84,3125 3709.04,3143.2 3632.24,3220 3610,3220 3605,3220 3580,3245 3515,3310
GND on Top Layer "Component Side-No Net 1" (solid, remove dead copper, pour order 47): 3350,3247.35 3350,3255 3370,3275 3460,3185 3521.22,3185 3570,3185 3580,3195 3599.83,3175.17 3599.83,3113.94 3298.94,3113.94 3270,3085
12V on Top Layer "Component Side-No Net 1" (solid, remove dead copper, pour order 48): 3553.12,3306.88 3553.12,3308.12 3580,3335 3630,3285 3645,3285 3665,3305 3785,3425 3790,3425 3795,3425 3820,3400 3825,3395 3825,3385 3810,3370 3730,3290 3730,3265 3730,3240 3720,3230 3700,3210 3690,3210 3665,3235 3665,3240 3640,3240 3635,3235 3630,3235 3625,3235
GND on Top Layer "Component Side-No Net 1" (solid, remove dead copper, pour order 49): 3545,3270 3580.89,3270 3590.49,3279.6 3600.09,3270 3710,3270 3710,3280 3825,3395 3915,3305 3915,3250 3915,3090 3900,3075 3885,3060 3415,3060
12V on Top Layer "Component Side-No Net 1" (solid, remove dead copper, pour order 50): 3785,3425 3785,3450 3790,3455 3795,3460 3875,3460 3880,3460 3880,3415 3893.39,3415 3885,3406.61 3885,3390 3865,3390 3854.59,3379.59 3830.41,3379.59 3824.59,3379.59 3795,3350 3790,3345 3755,3345 3755,3355 3735,3375
GND on Top Layer "Component Side-No Net 1" (solid, remove dead copper, pour order 51): 3830.41,3379.59 3870,3419.19 3870,3460 4015,3460 4020,3455 3995,3430 3995,3295 3995,3290 3985,3280 3975,3270 3975,3245 3825,3245 3775,3295
GND on Top Layer "Component Side-No Net 1" (solid, remove dead copper, pour order 52): 3380,3670 3415,3670 3420,3665 3420,3625 3420,3620 3435,3605 3490,3550 3510,3550 3515,3550 3570,3495 3575,3495 3590,3480 3595,3475 3565,3445 3550,3430 3545,3430 3535,3430 3485,3480 3355,3610 3355,3615 3355,3730 3360,3725 3380,3725
GND on Top Layer "Component Side-No Net 1" (solid, remove dead copper, pour order 53): 3380,3723.47 3380,3740 3355,3740 3355,3695 3355,3667.42 3379.7,3667.42
VMCU on Top Layer "Component Side-No Net 1" (solid, remove dead copper, pour order 55): 3530,3560 3600,3490 3610,3490 3635,3515 3555,3595 3530,3570
NetC12_2 on Top Layer "Component Side-No Net 1" (solid, remove dead copper, pour order 57): 3379.7,3706.04 3385.75,3700 3470,3700 3470,3640 3485,3625 3485,3605 3485,3598.22 3463.39,3576.61 3425,3615 3390,3615 3385,3615 3380,3620
GND on Top Layer "Component Side-No Net 1" (solid, remove dead copper, pour order 60): 3435,3630 3650,3630 3655,3605 3655,3560 3595,3560 3590,3555 3550,3515 3535,3515 3455,3515 3440.41,3529.59
VFAN on Top Layer "Component Side-No Net 1" (solid, remove dead copper, pour order 61): 3785,3465 3785,3625 3790,3630 3830,3630 3850,3650 3900,3650 3910,3640 3915,3635 3915,3570 3915,3465
GND on Top Layer "Component Side-No Net 1" (solid, remove dead copper, pour order 63): 3780,3600 3785,3605 3785,3730 3785,3735 3795,3745 3820,3770 4040,3770 4040,3395 4030,3385 3985,3340 3980,3340 3940,3340 3935,3345 3915,3365 3790,3365
GND on Top Layer "Component Side-No Net 1" (solid, remove dead copper, pour order 69): 3552.8,3873.56 3552.8,3822.2 3560,3815 3570,3805 3625,3805 3625,3828.02 3640.54,3843.56 3649.07,3852.09 3649.07,3873.56
GND on Top Layer "Component Side-No Net 1" (solid, remove dead copper, pour order 70): 3214.59,3369.59 3240.41,3369.59 3295,3315 3340,3270 3370,3270 3375,3270 3385,3260 3400,3245 3400,3240 3400,3230 3370,3200 3366.28,3196.28 3343.34,3196.28 3278.46,3196.28 3250.73,3224.01
GND on Top Layer "Component Side-No Net 1" (solid, remove dead copper, pour order 72): 3440,3205 3510,3205 3515,3205 3545,3235 3570,3210 3570,3145 3570,3130 3560,3120 3555,3115 3420,3115 3410,3115 3400,3125
3V7 on Top Layer "Component Side-No Net 1" (solid, remove dead copper, pour order 81): 3200,3540 3200,3555 3210,3565 3225,3565 3225,3570 3230,3575 3234.52,3579.52 3234.52,3635.99 3324.01,3635.99 3400,3560 3400,3550 3400,3540 3295,3435 3290,3430 3290,3400 3290,3395 3280,3385 3265,3370 3225,3370 3225,3415 3208.33,3416.67 3195,3430 3195,3450 3195,3490 3195,3510 3200,3515
3V7 on Top Layer "Component Side-No Net 1" (solid, remove dead copper, pour order 83): 3246.9,3633.1 3270,3656.21 3270,3735 3340,3735 3345,3730 3345,3600 3340,3595 3340,3585
GND on Top Layer "Component Side-No Net 1" (solid, remove dead copper, pour order 91): 2990,3370 3230,3370 3265,3405 3310,3450 3310,3740 2895,3740
3V7 on Top Layer "Component Side-No Net 1" (solid, remove dead copper, pour order 95): 3250.81,3370 3320,3370 3325,3375 3325,3415 3325,3430 3285,3470 3250,3470 3245,3475
3V7 on Top Layer "Component Side-No Net 1" (solid, remove dead copper, pour order 97): 3325,3410 3325,3500 3290,3500 3280,3490 3265,3475 3265,3425
GND on Top Layer "Component Side-No Net 1" (solid, remove dead copper, pour order 99): 3050,3090 3955,3090 4045,3180 4055,3190 4055,3910 4055,3915 3920,4050 3900,4070 3435,4070 3015,4070 2945,4000
GND on Top Layer "Component Side-No Net 1" (solid, remove dead copper, pour order 101): 3494.59,3476.22 3498.78,3476.22 3565.67,3409.33 3638.7,3482.35 3644.7,3482.35 3562.09,3564.97 3540,3545
GND on Top Layer "Component Side-No Net 1" (solid, remove dead copper, pour order 107): 3090,3495 3110,3475 3245,3475 3245,3380 3272.5,3352.5 3270,3350 3270,3260 3010,3260 3005,3255
SW on Top Layer "Component Side-No Net 1" (solid, remove dead copper, pour order 115): 3585,3274.31 3585,3285.13 3559.91,3310.22 3582.18,3332.5 3582.5,3332.5 3530,3385 3510,3365 3510,3345 3510,3325 3575,3260
GND on Top Layer "Component Side-No Net 1" (solid, remove dead copper, pour order 117): 3400,3235 3450,3185 3498.28,3185 3515,3201.72 3543.64,3230.35 3558.61,3230.35 3558.61,3196.72 3556.53,3194.64 3555,3193.11 3555,3095 3375,3095 3360,3110 3310.62,3159.38 3310.62,3178.06
GND on Top Layer "Component Side-No Net 1" (solid, remove dead copper, pour order 119): 3606.7,3426.7 3604.1,3426.7 3581.6,3404.21 3636.55,3349.27 3636.55,3346.6 3636.55,3370.21 3693.17,3426.83 3660,3460 3635.66,3460 3635.2,3460.46
GND on Top Layer "Component Side-No Net 1" (solid, remove dead copper, pour order 121): 3649.98,3334.05 3674.02,3310 3690,3310 3690,3315 3740,3365 3702,3403 3681.23,3403 3681.23,3391.28 3636.55,3346.6
GND on Top Layer "Component Side-No Net 1" (solid, remove dead copper, pour order 131): 3520,3830 3520,3745 3595.39,3744.61 3610,3759.21 3610,3805 3608.5,3806.5 3600,3815 3590,3815 3560,3815 3545,3830
GND on Top Layer "Component Side-No Net 1" (solid, remove dead copper, pour order 133): 3422.76,3812.81 3452.19,3812.81 3460,3805 3505,3805 3513.27,3796.73 3515,3795 3545,3795 3545,3830 3500,3830 3485,3845 3410,3845
12V on Signal Layer 1 "Component Side-No Net 1" (solid, remove dead copper, pour order 59): 3730,3370 3700,3340 3730,3310 3760,3340
VMCU on Signal Layer 1 "Component Side-No Net 1" (solid, remove dead copper, pour order 74): 3615,3790 3615,3905 3610,3910 3620,3920 3695,3920 3720,3920 3775,3865 3800,3840 3800,3765 3800,3705 3785,3690
3V7 on Signal Layer 1 "Component Side-No Net 1" (solid, remove dead copper, pour order 85): 3195,3505 3195,3430 3225,3400 3375,3400 3375,3625 3360,3640 3359.54,3640.46 3230.46,3640.46 3220,3630 3220,3530
GND on Signal Layer 1 "Component Side-No Net 1" (solid, remove dead copper, pour order 123): 3490,3670 3515,3695 3845,3695 3845,3520 3870,3495 3860,3505 3465,3505
3V7 on Signal Layer 1 "Component Side-No Net 1" (solid, remove dead copper, pour order 125): 3225,3400 3225,3375 3355,3375 3365,3375 3375,3385 3375,3430 3230,3430 3225,3435
GND on Signal Layer 1 "Component Side-No Net 1" (solid, remove dead copper, pour order 127): 2960,3015 2985,3040 4005,3040 4005,3930 3930,4005 3900,4035 3405,4035 3140,4035 3015,3910
GND on Signal Layer 1 "Component Side-No Net 1" (solid, remove dead copper, pour order 129): 3670,4040 3650,4020 3650,3715 3900,3715 3905,3710 3915,3720 3915,4005
VBAT on Internal Plane 1 (split plane): 3349.9,3632.89 3349.9,3437.11 3342.89,3430.1 3247.11,3430.1 3240.1,3437.11 3240.1,3632.89 3247.11,3639.9 3342.89,3639.9
GND on Internal Plane 1 (split plane): 153 vertices, not listed, extent 3130.26,3130.26 3956.36,3956.36

## Keep-outs
Keep-Out Layer:
  circle w10: c3543.31,3543.31 r433.07

## Other copper
Top Layer:
  pour cut-out: 3400,3550 3245,3395 3245,3380 3300,3325 3460,3485 3465,3485
Bottom Layer:
  pour cut-out: 3375,3275 3400,3275 3400,3245 3375,3245
Internal Plane 1 (plane layer: these items are gaps in the copper):
  lines w10: 3235,3435 3245,3425 3345,3425 3355,3435 3355,3635 3345,3645 3245,3645 3235,3635 3235,3435

## Silkscreen, mask and mechanical layers (free items; w line width, h text height)
Top Overlay:
  circle w10: c3543.31,3543.31 r393.7
  rectangle: 3423.19,3736.69 3446.81,3750
  rectangle: 3618.19,3900 3641.81,3913.31
  lines w10: 3250,3385 3300,3335 3300,3355 ; 3320,3755 3335,3755 3355,3735 3365,3735
  text "G" at 3460,3820 h55
  text "K" at 3385,3800 h55
  text "B" at 3335,3765 h55
  text "P" at 3725,3760 h59.06
  text "G" at 3825,3740 h51.18
  text "R" at 3375,3715 h55
  text "V" at 3870,3650 h51.18
  text "6" at 3860,3380 h55.12
  text "抄板死妈" at 3315,3365 h55.12 r45
  text "35" at 3460,3295 h55.12 r45
  text "烫" at 3480,3165 h55.12 r45
Bottom Overlay:
  circle w10: c3543.31,3543.31 r374.02
  text "250913" at 3555,3860 h43.31
  text "C" at 3450,3780 h55
  text "G" at 3685,3780 h55
  text "3.7-8.4V" at 3500,3695 h55
  text "+" at 3445,3640 h55
  text "P" at 3870,3640 h55
  text "Redstoner_35" at 3710,3495 h55 r270
  text "Designed by:" at 3760,3470 h55 r270
  text "Project:" at 3715,3440 h55 r45
  text "FarBeaMon3tr" at 3810,3420 h49.21 r45
  text "DFEx-" at 3735,3400 h49.21 r45
  text "Fan Handle" at 3570,3370 h55
  text "Controller" at 3565,3330 h55
Top Solder:
  circle w39.37: c3543.31,3543.31 r419.29
Bottom Solder:
  circle w59.06: c3543.31,3543.31 r410.63
  rectangle: 3525,3220 3603.74,3298.74
  text "V1.1" at 3370,3830 h42 r38